# Altium PCB 红外反射LM393.PcbDoc
Units mm, origin at the board's own origin, x right, y up, seen from the top; angles counter-clockwise.
Board outline 152.4 x 101.6 mm, 2 copper layers (Top Layer, Bottom Layer); 10 components, 7 nets, 32 pads, 1 vias.
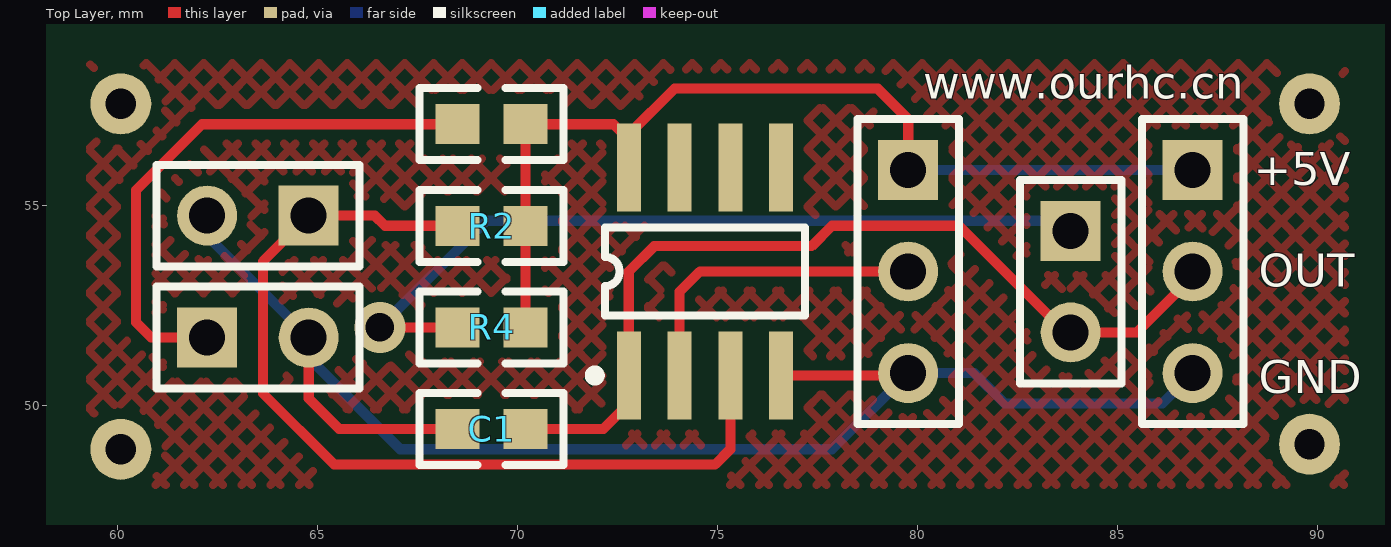
[diagram p0: Top Layer view]
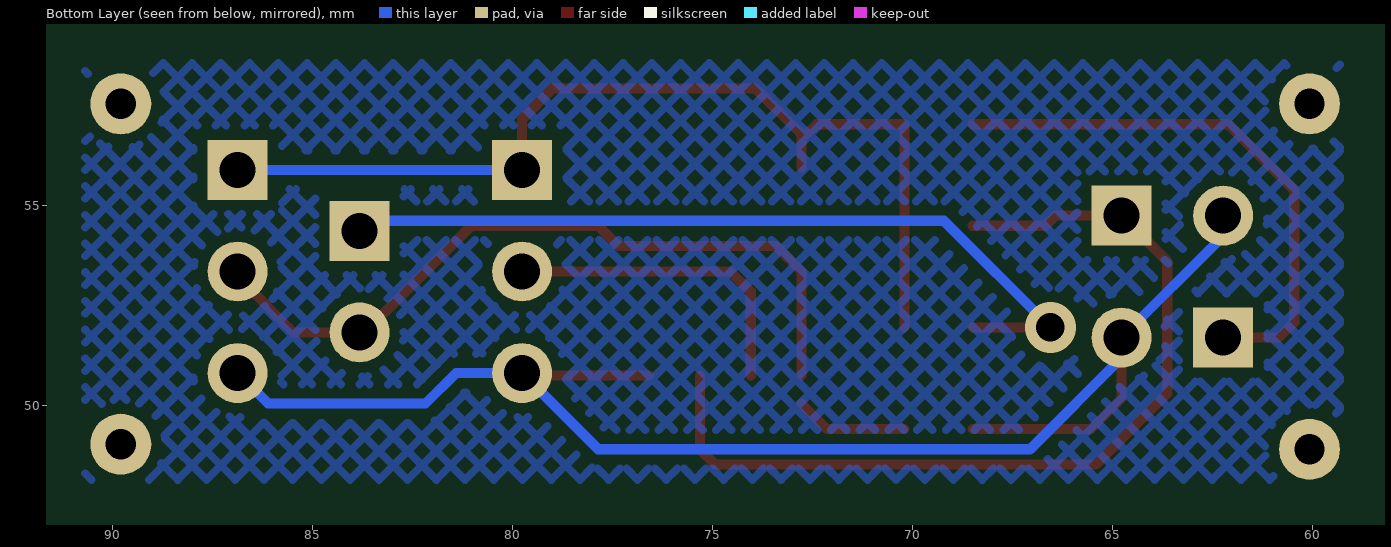
[diagram p1: Bottom Layer view, seen from below]

## Layer stack, top to bottom
Top Layer: signal copper 0.0356
Dielectric: dielectric 0.32, FR-4, Dk 4.8
Bottom Layer: signal copper 0.0356

## Board outline
25.4,25.4 177.8,25.4 177.8,127 25.4,127

## Design rules (kind name [scope] priority, off if disabled: settings)
Clearance [All] p1: gap=0.254
ComponentClearance [All] p1: gap=0.254 collisioncheckmode=3 verticalgap=0.254
PolygonConnect [All] p1: connectstyle=Relief reliefconductorwidth=0.254 reliefentries=4 polygonreliefangle="90 Angle"
RoutingVias [All] p1: holewidth=0.711 width=1.27 viastyle="Through Hole" minholewidth=0.711 minwidth=1.27 maxholewidth=0.711 maxwidth=1.27
SolderMaskExpansion [All] p1: expansion=0.102
TestPointUsage [All] p1: valid=0 allowmultiple=FALSE
Testpoint [All] p1: side=15 testpointundercomponent=TRUE minsize=1.016 maxsize=2.54 preferedsize=1.524 minholesize=0 maxholesize=1.016 preferedholesize=0.813 testpointgrid=0.025 style=1023 order=0123456789
Width [All] p1: maxlimit=0.254 minlimit=0.254 preferedwidth=0.254
17 further rules are at their usual default settings.

## Classes and differential pairs
component class 红外反射LM393: " " +5V GND OUT ""

## Components (designator, comment, footprint, x,y, rotation, side; value= is the part's Value field where it differs from the comment)
+5V "Header 3" HDR1X3 86.868,55.88 r270 top (schematic designator JP1)
C1 "" C1608-0603 69.342,49.403 r0 top
GND "" HDR1X2 83.82,54.356 r270 top (schematic designator LED1)
JX-359F1 "" HDR1X2 62.23,51.689 r0 top
JX-359F2 "" HDR1X2 64.77,54.737 r180 top
OUT "" HDR1X3 79.756,55.88 r270 top (schematic designator R3)
R1 "" C1608-0603 69.342,57.023 r0 top
R2 "" C1608-0603 69.342,54.483 r0 top
R4 "" C1608-0603 69.342,51.943 r0 top
U1 "LM393AD" SO8 74.676,53.34 r0 top

## Footprints (in the part's own frame and the unit in brackets; to place one, negate y for a bottom-side part, rotate by r counter-clockwise, add the part's x,y. Pads: shape width x height; smd on the part's side, far side on the other; paste and mask are expansions set on the pad)
C1608-0603 [mm] "Chip Resistor; Body 1.6 x 0.8 mm (LxW typ)"
  rect 1.1x1 smd: 1(-0.85,0) 2(0.85,0)
  silkscreen extent -1.8,-0.9 1.8,0.9
HDR1X2 [mm] "Connector; Header; 2 Position"
  rect 1.5x1.5 hole 0.9: 1(0,0)
  round 1.5 hole 0.9: 2(2.54,0)
  silkscreen extent -1.27,-1.27 3.81,1.27
HDR1X3 [mm] "Connector; Header; 3 Position"
  rect 1.5x1.5 hole 0.9: 1(0,0)
  round 1.5 hole 0.9: 2(2.54,0) 3(5.08,0)
  silkscreen extent -1.27,-1.27 6.35,1.27
SO8 [mm] "Small Outline; 8 Leads; Body Width 3.9 mm; Pitch 1.27 mm"
  rect 0.6x2.2 smd: 1(-1.905,-2.6) 2(-0.635,-2.6) 3(0.635,-2.6) 4(1.905,-2.6) 5(1.905,2.6) 6(0.635,2.6) 7(-0.635,2.6) 8(-1.905,2.6)
  silkscreen extent -2.88,-2.72 2.5,1.1

## Part data
+5V: "Header, 3-Pin"
C1: library part "Cap Semi", "Capacitor (Semiconductor SIM Model)"
GND JX-359F1: library part LED3, "Typical BLUE SiC LED"
JX-359F2: library part "Photo Sen", "Photosensitive Diode"
OUT: library part RPot, "Potentiometer"
R1 R2 R4: library part Res2, "Resistor"
U1: "Low-Power Dual Voltage Comparator"

## Free pads (board coordinates)
  round 1.524 hole 0.762: 0(89.789,57.531) 1(89.789,49.022) 2(60.071,57.531) 3(60.071,48.895)

## Via types
v1: diameter 1.27, hole 0.711, Top Layer to Bottom Layer, 1 vias

## Nets (pads, with @x,y where several pads share a name; then routed paths per layer and width w, separated by ;. In a path a pad name is that pad's centre, name@x,y a point inside that pad or via, vN(x,y) a via of type N, cw(c..) or ccw(c..) an arc to the next point about the centre after c; other vN are vias at no path point)
GND: +5V.3 C1.1 JX-359F1.2 JX-359F2.2 OUT.3 U1.4 | length 38.3
  Top Layer w0.254: JX-359F2.2@62.23,54.229 JX-359F2.2 ; JX-359F1.2 64.77,50.165 65.532,49.403 C1.1 ; U1.4 79.696,50.74 OUT.3
  Bottom Layer w0.254: JX-359F2.2 62.23,54.229 JX-359F1.2 64.77,51.181 67.056,48.895 77.851,48.895 OUT.3 81.407,50.8 82.169,50.038 86.106,50.038 +5V.3
NetC1_2: +5V.2 C1.2 GND.2 U1.1 | length 21.6
  Top Layer w0.254: C1.2 72.136,49.403 U1.1@72.771,50.038 ; U1.1 72.771,53.34 73.406,53.975 77.343,53.975 77.851,54.483 81.026,54.483 83.439,52.07 GND.2@83.693,52.07 ; GND.2 85.471,51.816 86.868,53.213 +5V.2
NetJX-359F1_1: JX-359F1.1 R1.1 | length 14
  Top Layer w0.254: JX-359F1.1 60.833,51.689 60.452,52.07 60.452,55.372 62.103,57.023 R1.1
NetJX-359F2_1: JX-359F2.1 R2.1 U1.3 | length 23.2
  Top Layer w0.254: R2.1 66.675,54.483 66.421,54.737 JX-359F2.1 63.627,53.594 63.627,50.292 65.405,48.514 74.93,48.514 75.311,48.895 U1.3
NetLED1_1: GND.1 R4.1 | length 20.2
  Top Layer w0.254: v1(66.548,51.943) R4.1
  Bottom Layer w0.254: v1(66.548,51.943) 69.215,54.61 GND.1@83.693,54.61
NetR3_3: OUT.2 U1.2 | length 8
  Top Layer w0.254: U1.2 74.041,52.832 74.549,53.34 OUT.2
VCC: +5V.1 OUT.1 R1.2 R2.2 R4.2 U1.8 | length 24.6
  Top Layer w0.254: R4.2 R1.2 72.39,57.023 U1.8@72.644,56.769 ; U1.8 72.771,56.769 73.914,57.912 78.994,57.912 79.756,57.15 OUT.1
  Bottom Layer w0.254: OUT.1 +5V.1
pads on no net: U1.5 U1.6 U1.7

## Polygon pours and split planes (outlines as drawn)
no net on Top Layer (hatched 45Degree grid 0.508 track 0.203): 59.309,58.547 90.678,58.547 90.678,48.006 59.309,48.006
no net on Bottom Layer (hatched 45Degree grid 0.508 track 0.203): 59.182,58.547 90.678,58.547 90.678,48.133 59.309,48.133 59.309,58.547

## Silkscreen, mask and mechanical layers (free items; w line width, h text height)
Top Overlay:
  text "www.ourhc.cn" at 80.137,57.658 h0.82
Mechanical 1:
  lines w0.254: 55.477,60.442 55.988,58.919 ; 55.502,45.846 56.007,47.371 ; 55.734,58.918 56.242,58.919 ; 55.753,47.371 56.261,47.371 ; 55.983,61.459 55.988,58.919 ; 56.011,44.831 56.007,47.371 ; 56.493,60.444 55.988,58.919 ; 56.518,45.848 56.007,47.371 ; 58.547,61.595 58.547,62.103 ; 60.071,61.341 58.547,61.849 ; 60.071,62.357 58.547,61.849 ; 66.906,61.849 58.547,61.849 ; 82.954,61.849 91.313,61.849 ; 89.789,61.341 91.313,61.849 ; 89.789,62.357 91.313,61.849 ; 91.313,61.595 91.313,62.103 ; 58.928,47.625 58.928,58.928 91.186,58.928 91.186,47.625 58.928,47.625
  text "11.5479 (mm)" at 52.327,61.417 h1.52 r270.1
  text "32.766 (mm)" at 67.16,60.935 h1.52